# Altium PCB 4_Lay_PCB.PcbDoc (part 1 of 2)
Units mm, origin at the board's own origin, x right, y up, seen from the top; angles counter-clockwise.
Board outline 51.1 x 75.4 mm, 4 copper layers (Top, Signal Layer 1, Signal Layer 2, Bottom), stack 1.641 mm thick; 181 components, 104 nets, 542 pads, 589 vias.
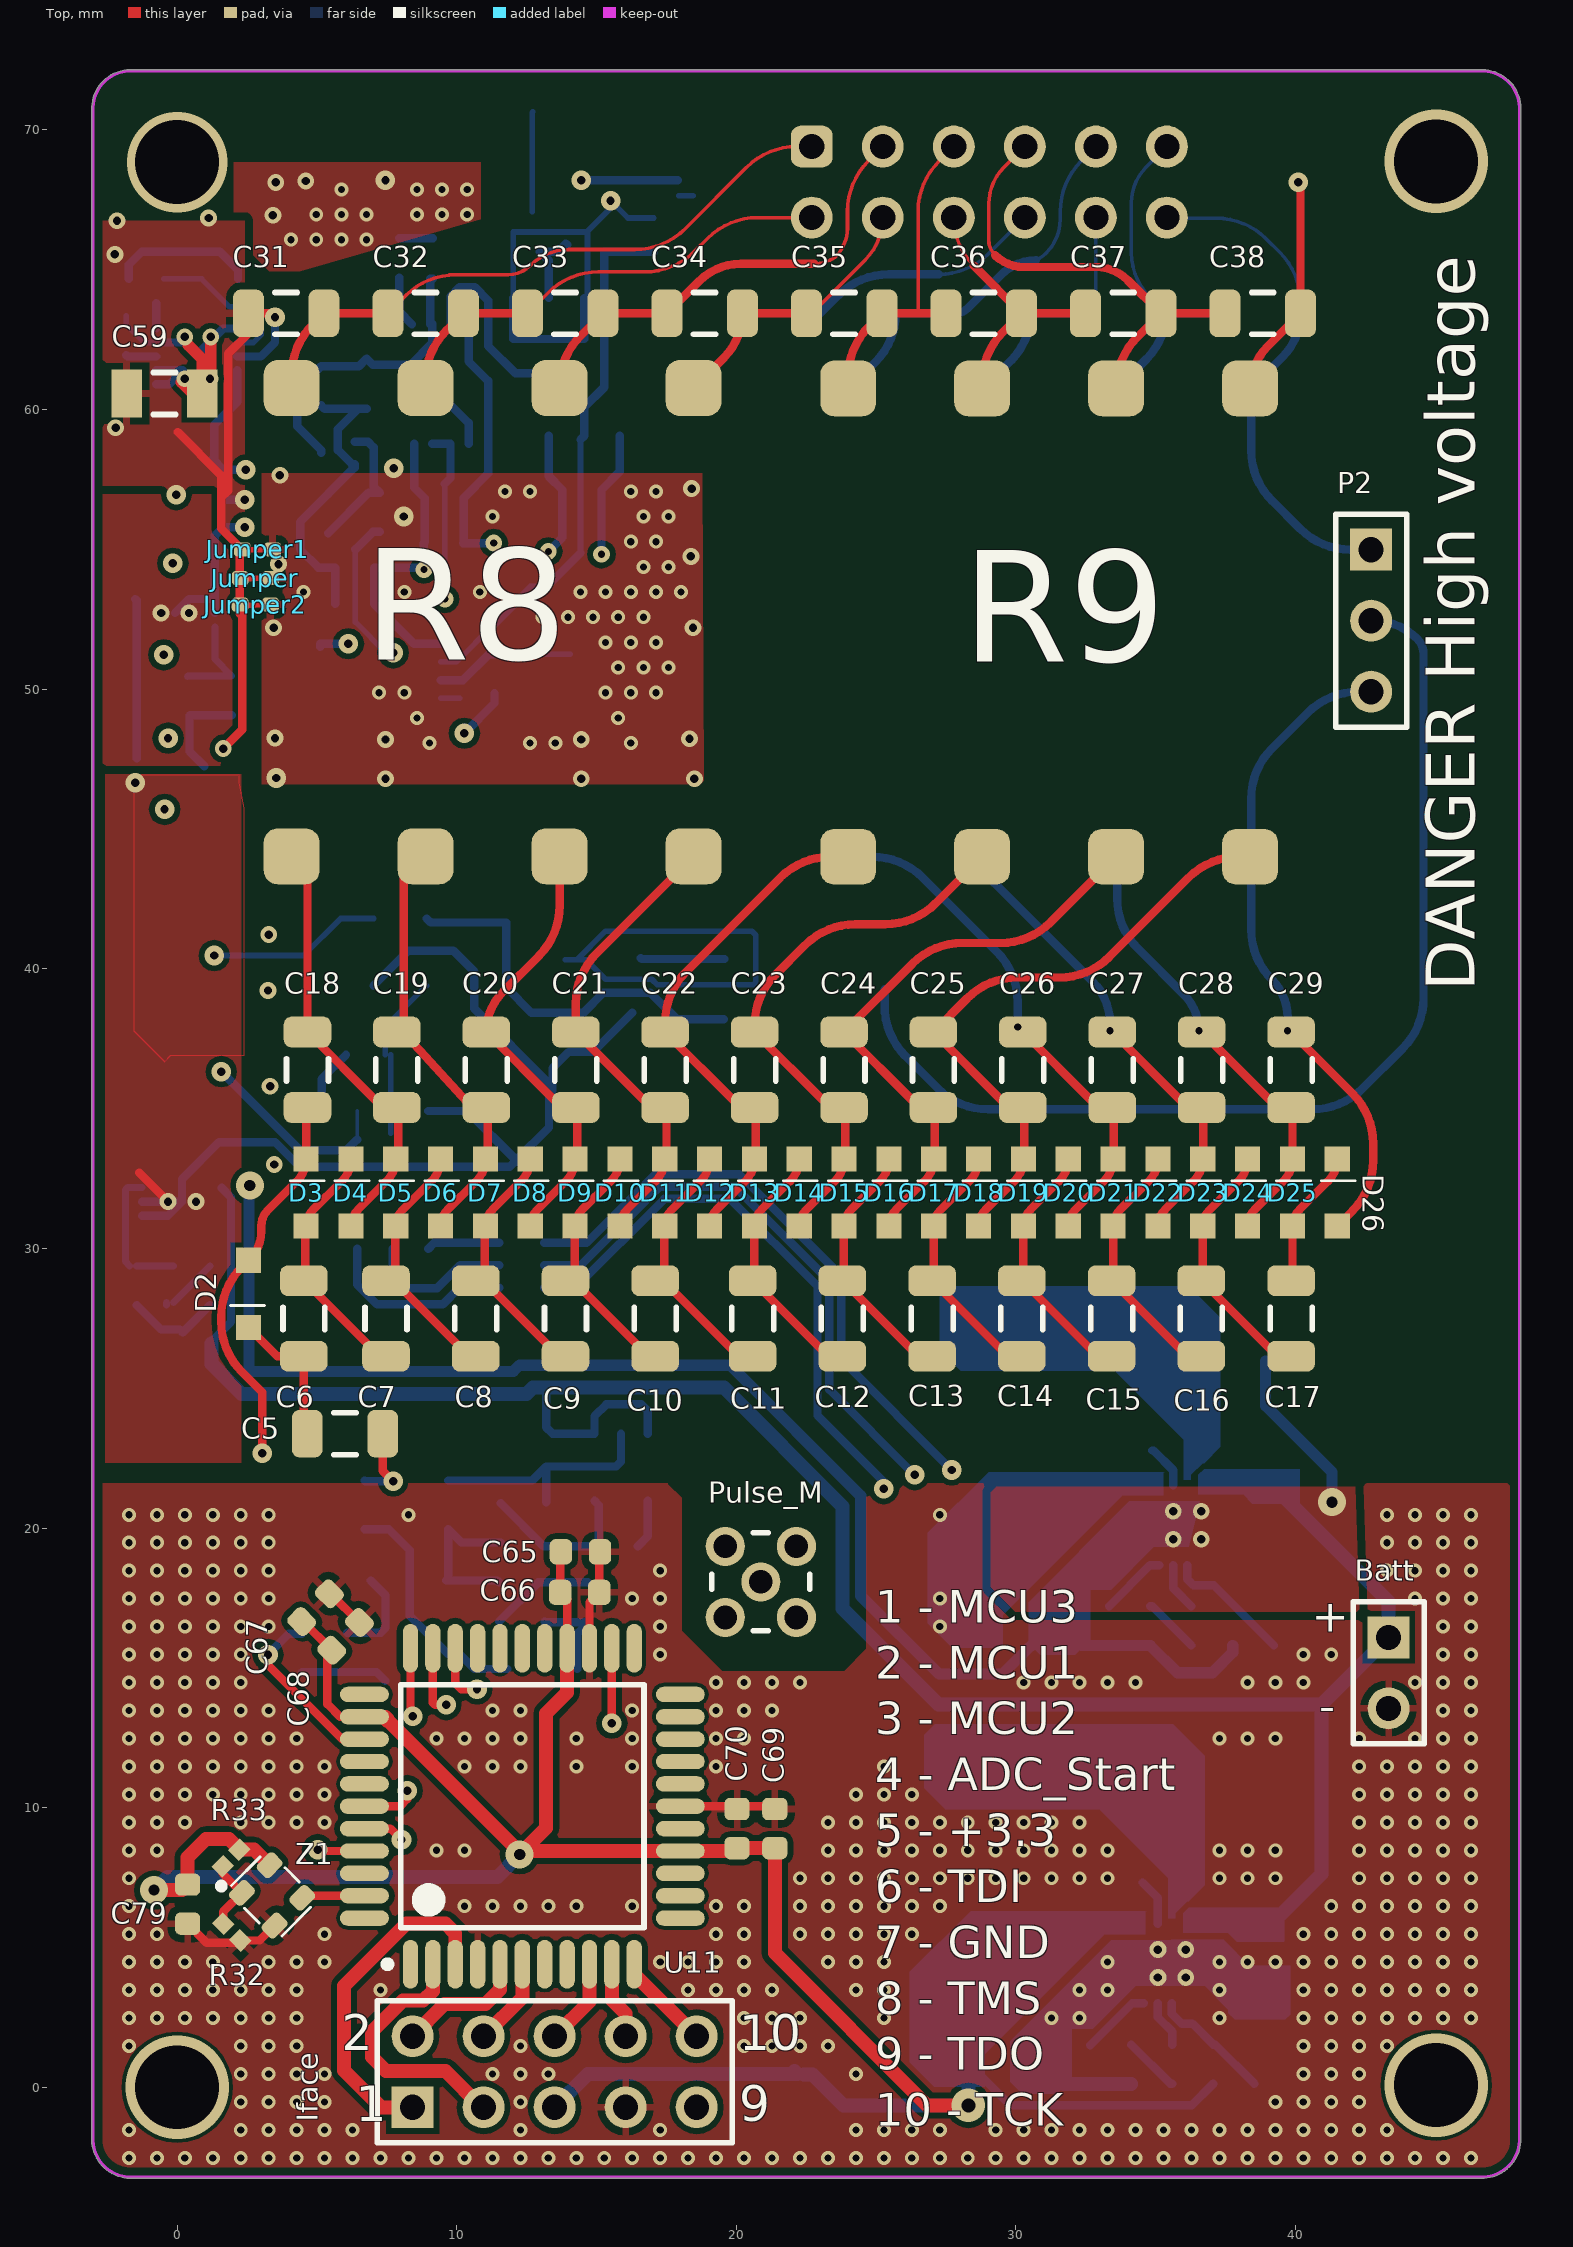
[diagram p0: Top view]
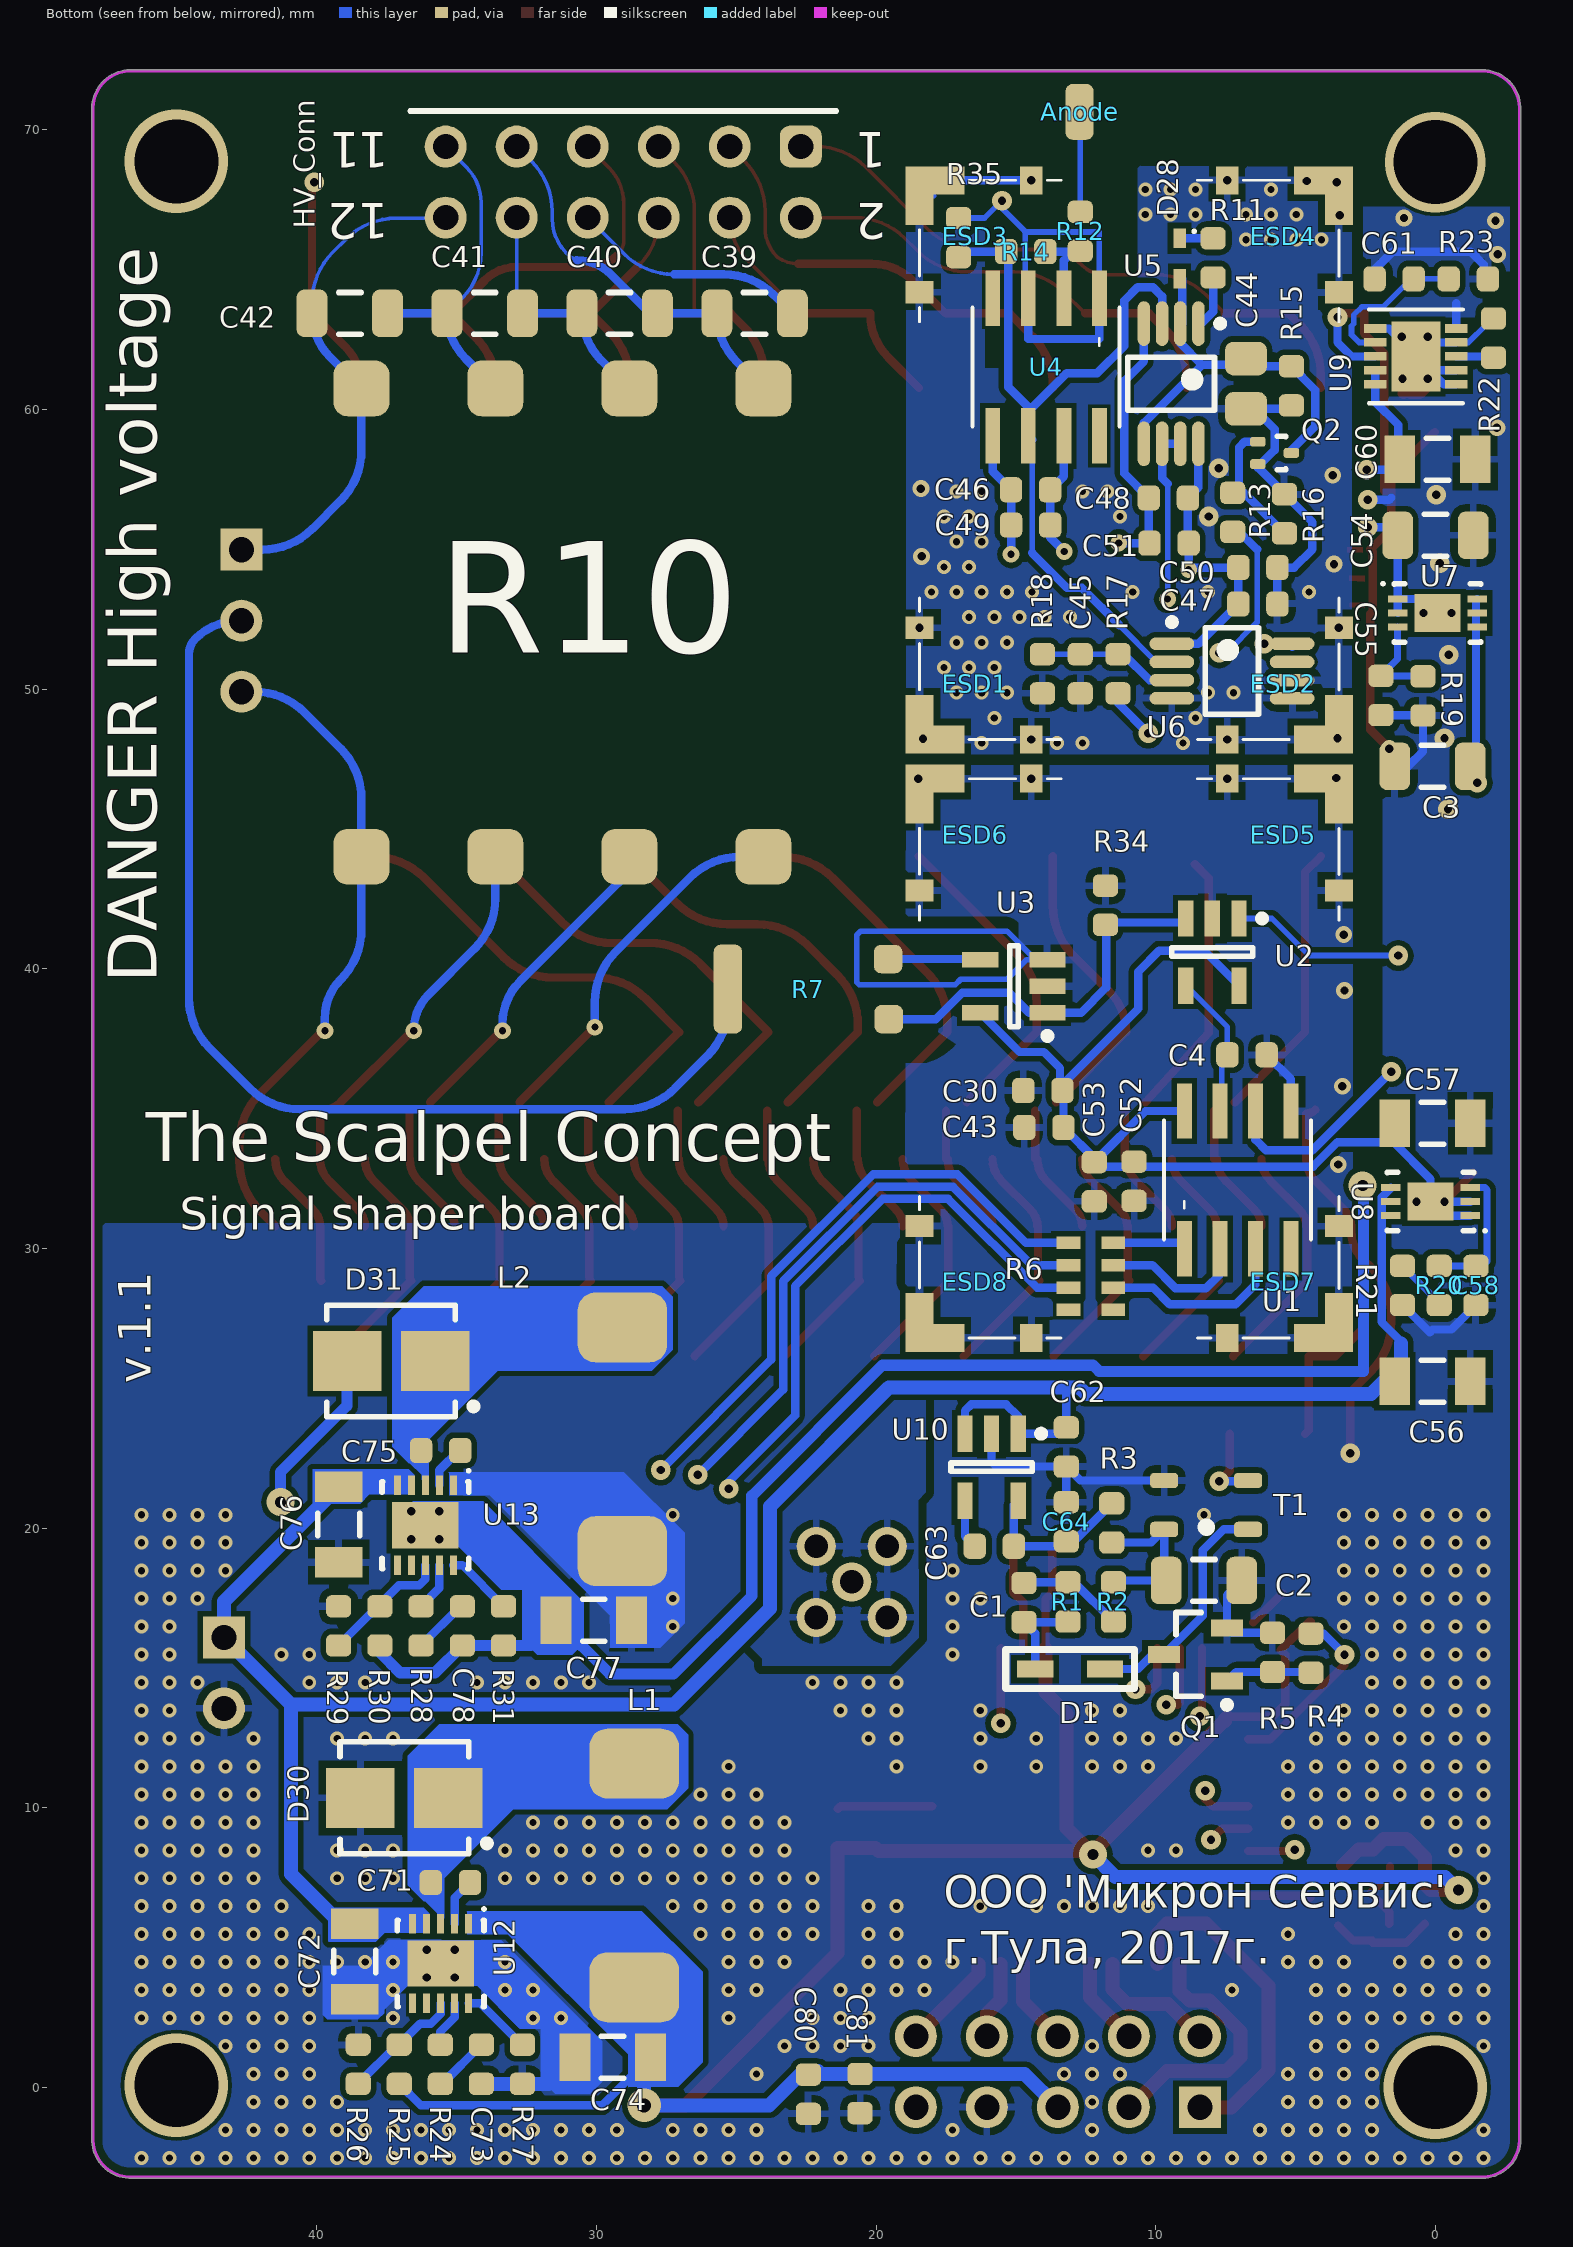
[diagram p1: Bottom view, seen from below]
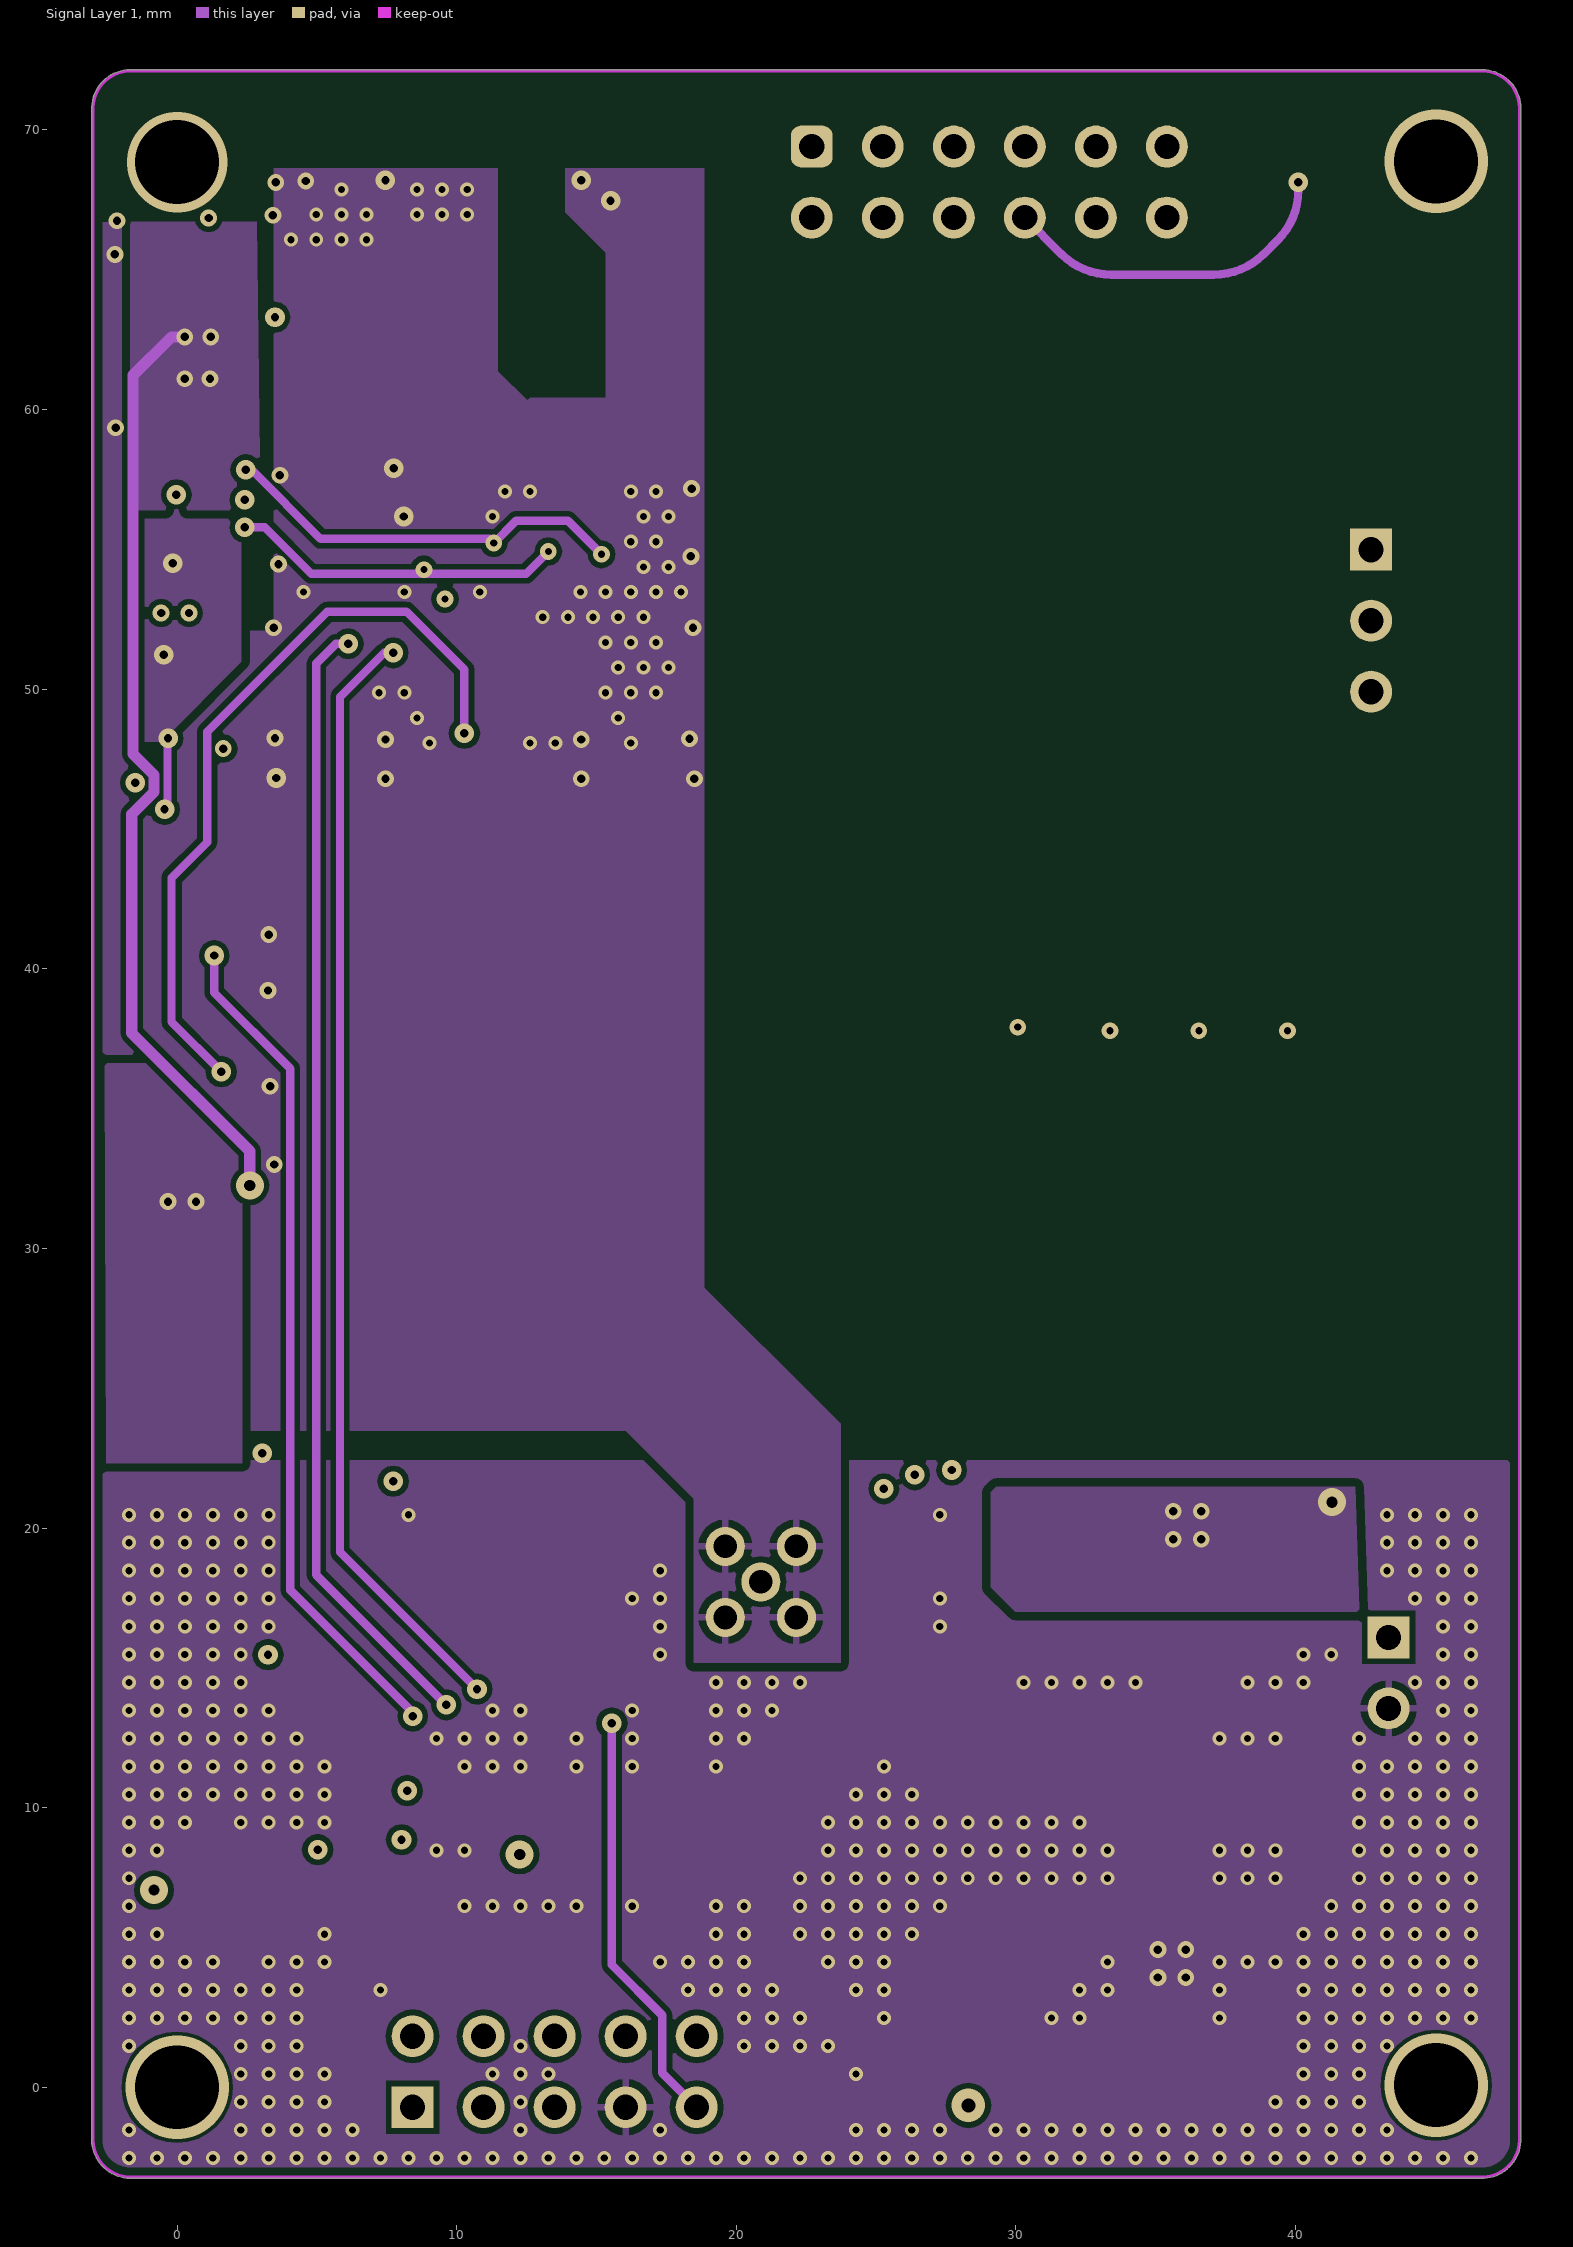
[diagram p2: Signal Layer 1]
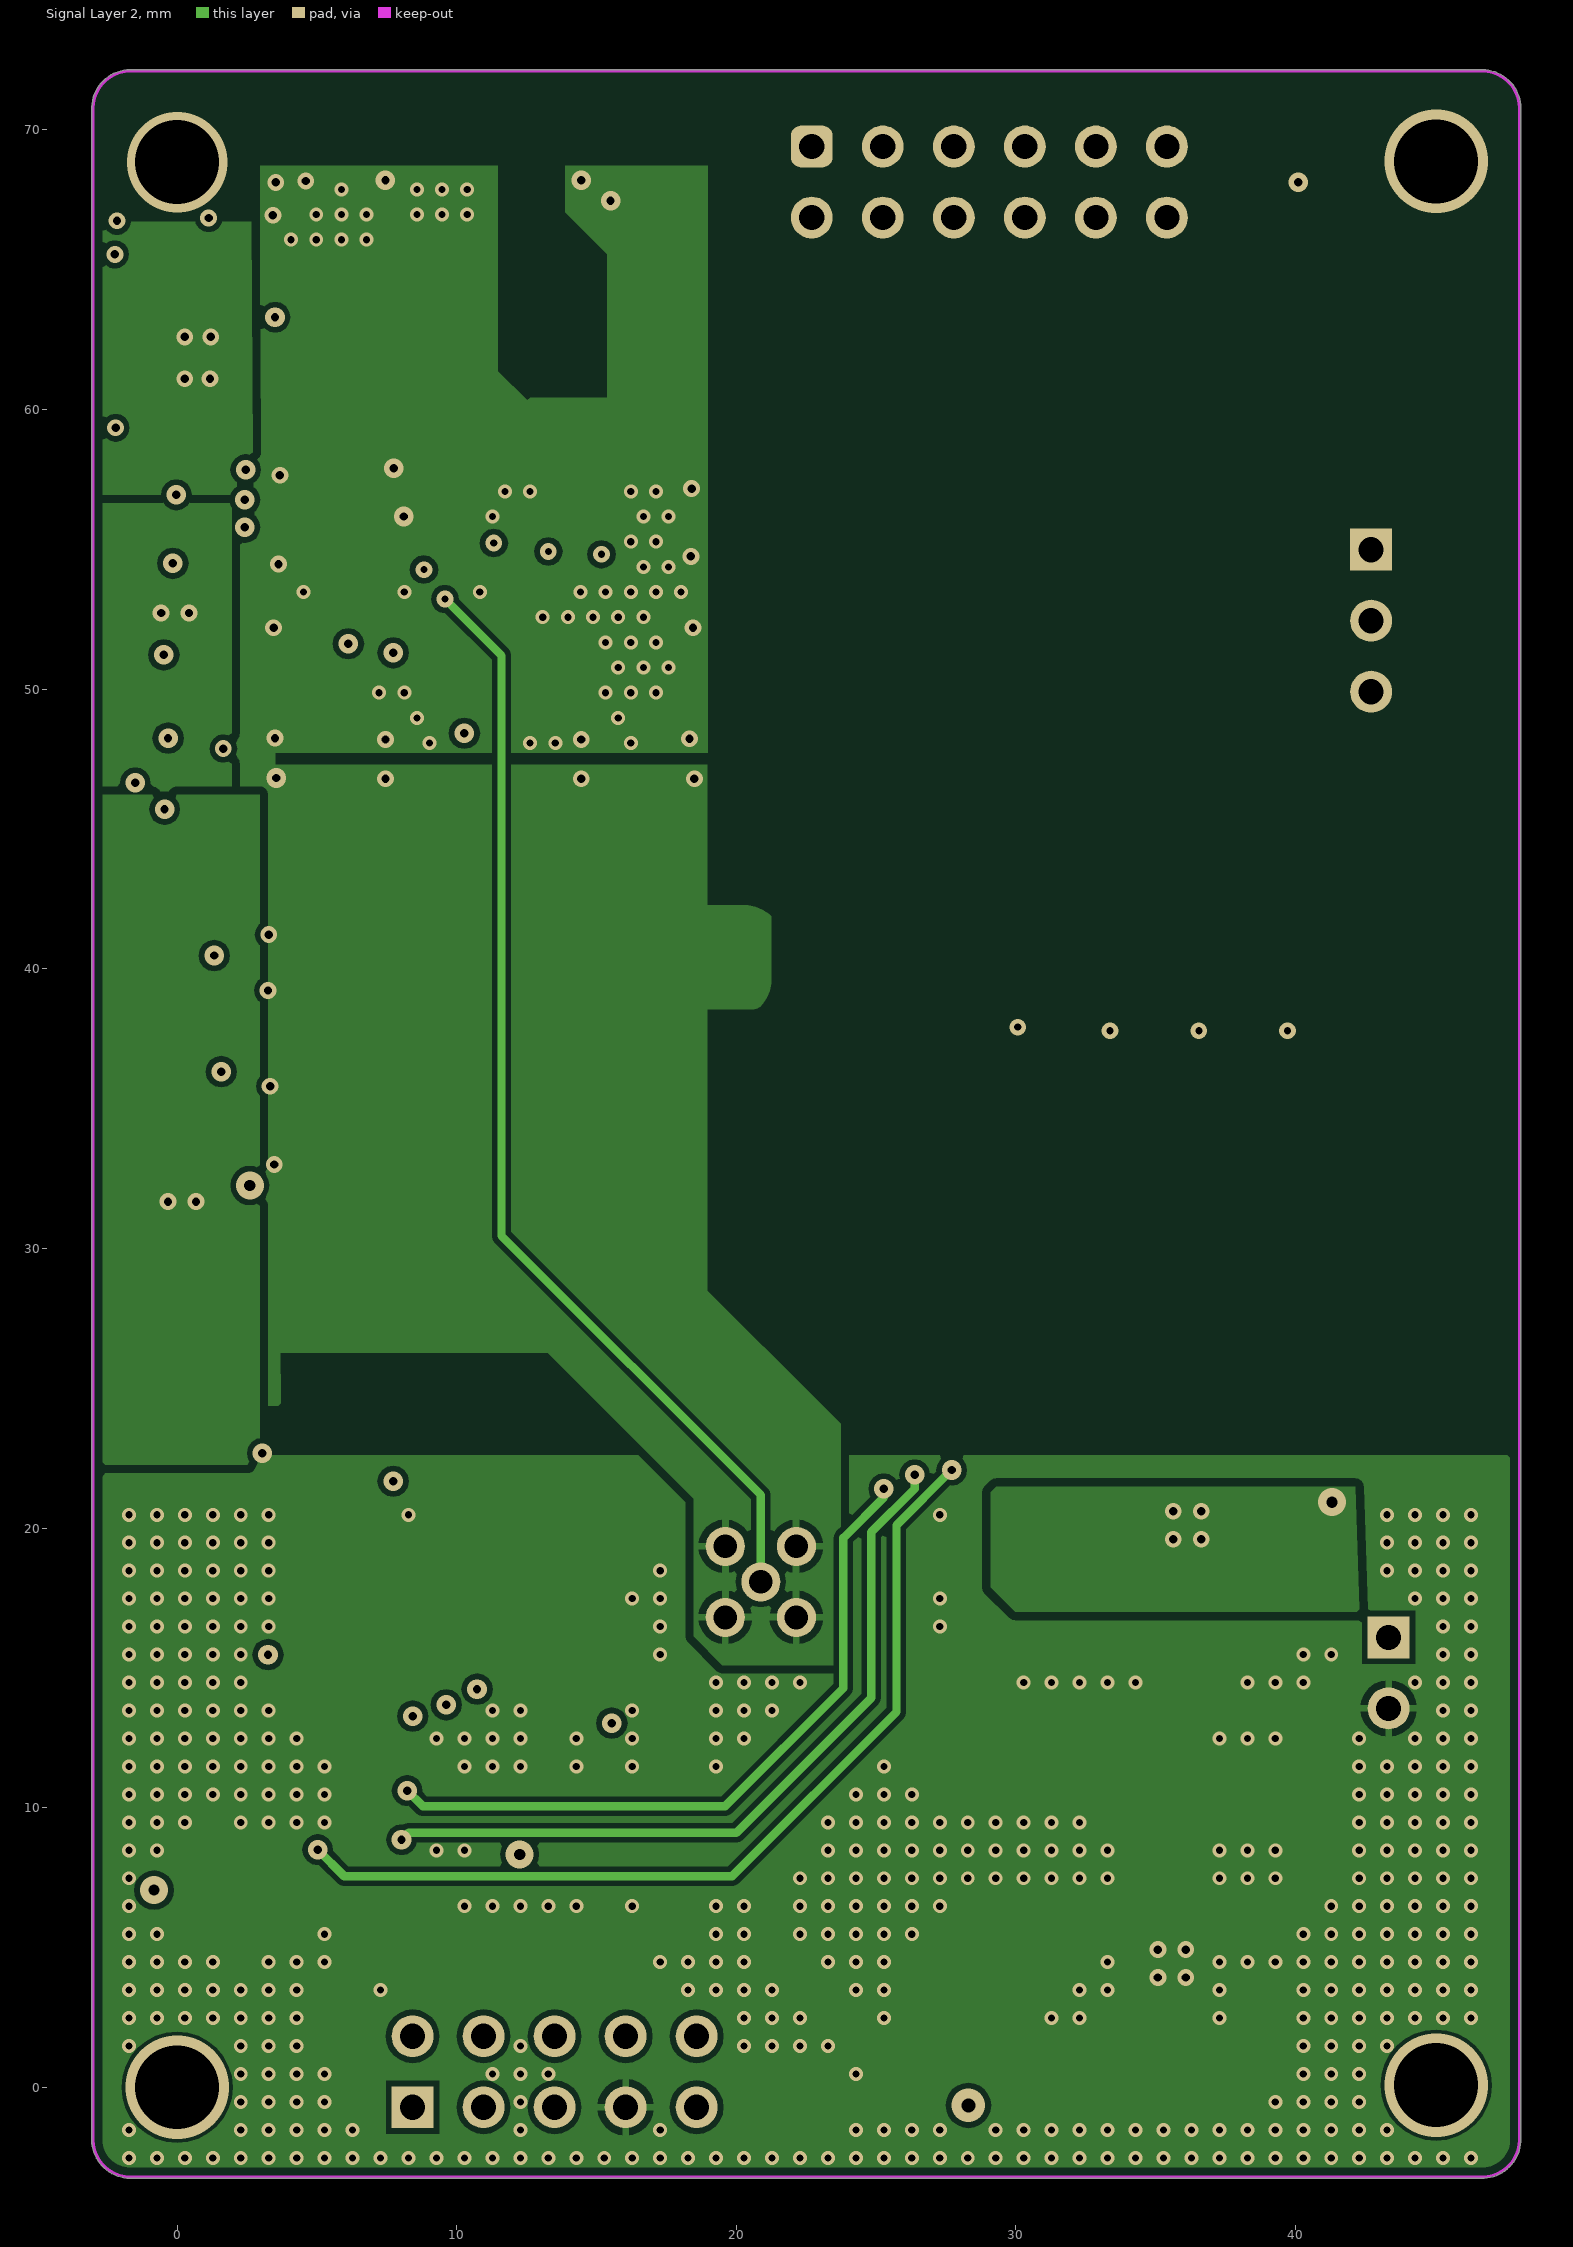
[diagram p3: Signal Layer 2]
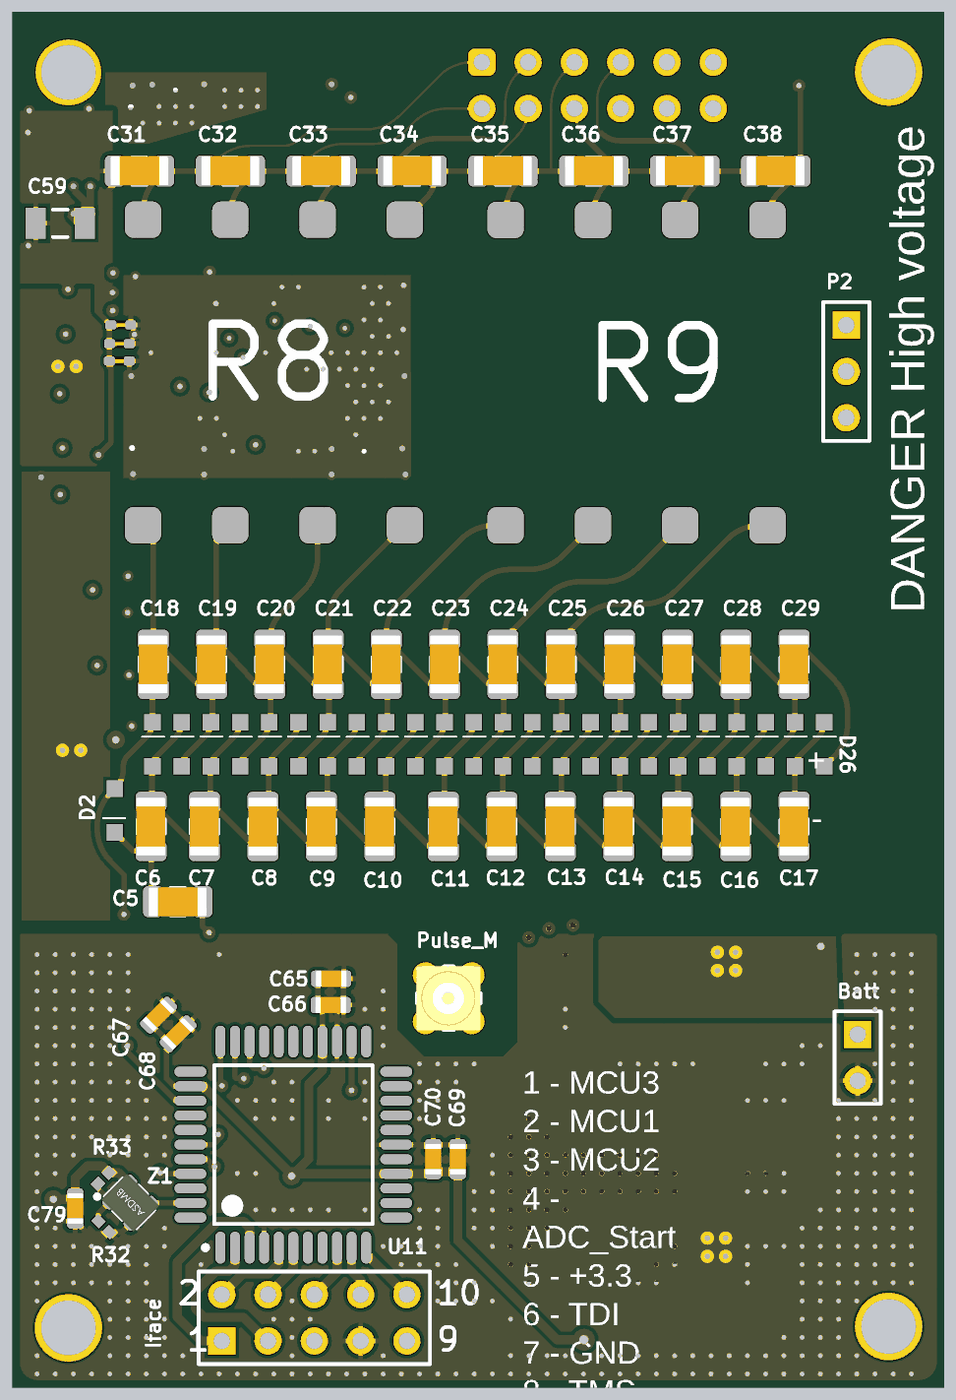
[diagram p5: 3D render of the assembled board from above, using the file's embedded part models]
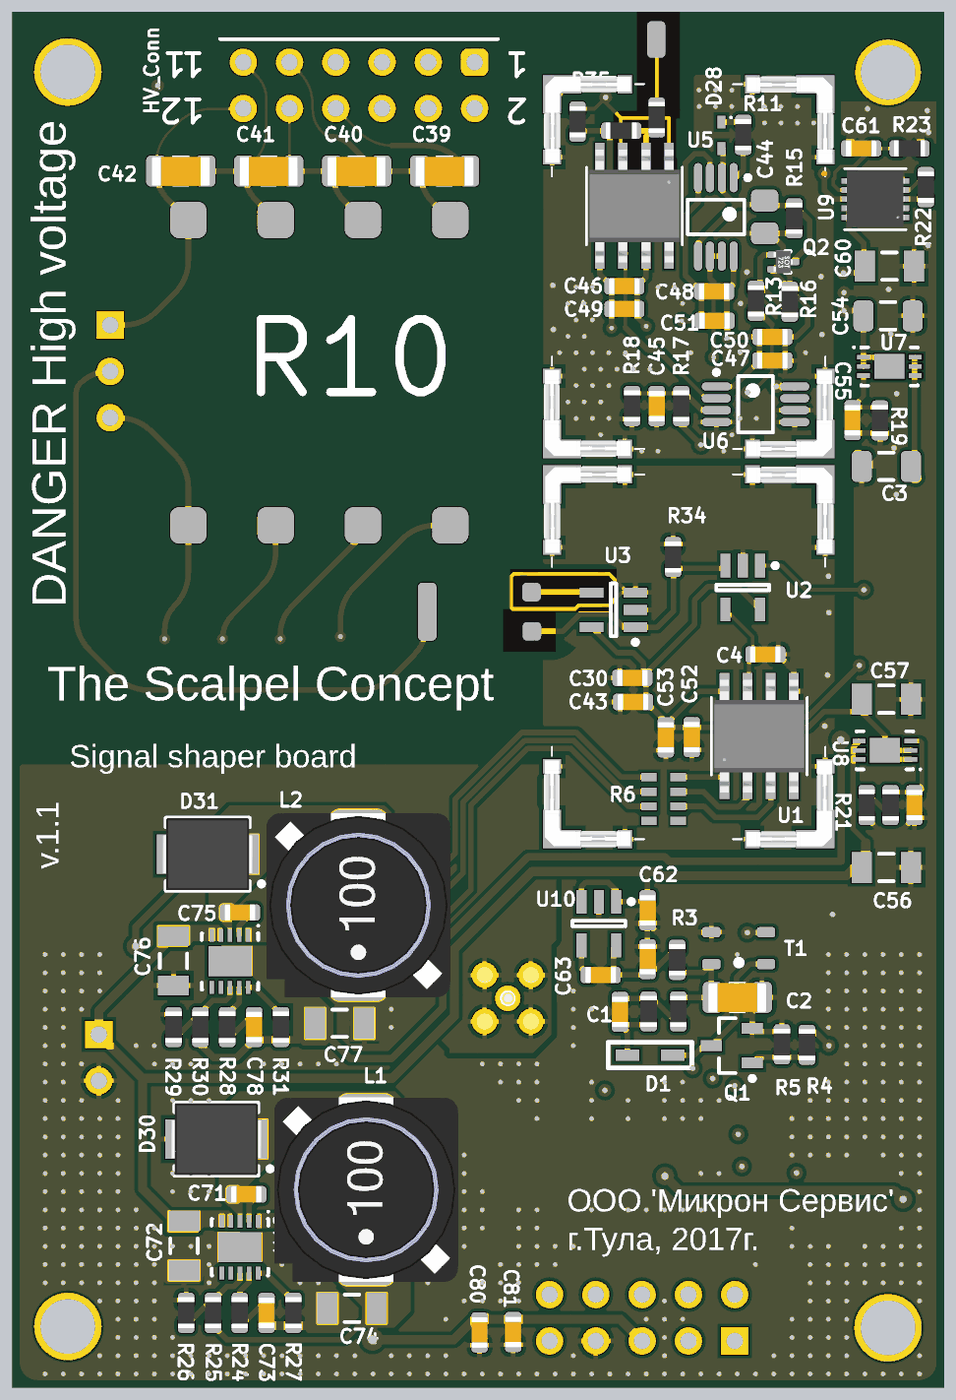
[diagram p6: 3D render of the assembled board from below, using the file's embedded part models]

## Layer stack, top to bottom
Top Solder: solder mask 0.0254, Solder Resist, Dk 3.5
Top: signal copper 0.0356
Pereg: prepreg 0.1702, FR408, Dk 3.66
Signal Layer 1: signal copper 0.0178
Core: core 1.1938, FR408, Dk 3.66
Signal Layer 2: signal copper 0.0178
Pereg: prepreg 0.1702, FR408, Dk 3.66
Bottom: signal copper 0.0356
Bottom Solder: solder mask 0.0254, Solder Resist, Dk 3.5

## Board outline
-3.051,-1.88 cw(c-3,-1.88) -3.05,-1.873 -3.05,70.805 cw(c-3,70.805) -3.05,70.811 cw(c-1.68,70.78) -1.68,72.151 cw(c-1.68,72.1) -1.672,72.15 46.68,72.15 cw(c46.68,70.779) 48.051,70.779 cw(c48,70.779) 48.05,70.772 48.05,-1.925 cw(c48,-1.925) 48.049,-1.936 cw(c46.68,-1.88) 46.732,-3.25 cw(c46.725,-3.2) 46.725,-3.25 46.716,-3.25 cw(c46.68,-1.88) 46.68,-3.251 cw(c46.68,-3.201) 46.672,-3.25 -1.68,-3.25 cw(c-1.68,-1.88)

## Design rules (kind name [scope] priority, off if disabled: settings)
BoardOutlineClearance [All] p1: gap=0.381
Clearance Clearance_polytopoly [InPolygon vs InPolygon] p1: gap=0.3
Clearance Clearance_polytotrace [InPolygon vs InAnyNet] p2: gap=0.2
Clearance Clearance_1 [All] p3: gap=0.127
HoleSize [All] p1: absolutevalues=TRUE maxlimit=6.604 minlimit=0.254 maxpercent=80.000 minpercent=20.000
MinimumAnnularRing [All] p1: minimumring=0.102
PolygonConnect PolygonConnect_via [IsVia] p1: connectstyle=Direct reliefconductorwidth=0.254 reliefentries=4 polygonreliefangle="90 Angle" airgapwidth=0.254
PolygonConnect [All] p2: connectstyle=Relief reliefconductorwidth=0.254 reliefentries=4 polygonreliefangle="90 Angle" airgapwidth=0.254
RoutingTopology [InNet('No Net')] p1: topology=Shortest
RoutingVias [All] p1: holewidth=0.254 width=0.457 viastyle="Through Hole" minholewidth=0.254 minwidth=0.457 maxholewidth=2.54 maxwidth=2.54
SolderMaskExpansion [All] p1: expansion=0.064
Width [All] p1: maxlimit=2.54 minlimit=0.127 preferedwidth=0.254
28 further rules are at their usual default settings.

## Classes and differential pairs
component class FEU31_Part2: Anode C1 C2 C3 C4 C5 C6 C7 C8 C9 C10 C11 C12 C13 C14 C15 C16 C17 C18 C19 C20 C21 C22 C23 C24 C25 C26 C27 C28 C29 C30 C31 C32 C33 C34 C35 C36 C37 C38 C39 C40 C41 C42 C43 C44 C45 C46 C47 C48 C49 C50 C51 C52 C53 C54 C55 C56 C57 C58 C59 C60 C61 C62 C63 C64 D1 D2 D3 D4 D5 D6 D7 D8 D9 D10 D11 D12 D13 D14 D15 D16 D17 D18 D19 D20 D21 D22 D23 D24 D25 D26 D28 ESD1 ESD2 ESD3 ESD4 ESD5 ESD6 ESD7 ESD8 ESD? HV_Conn Jumper Jumper1 Jumper2 P2 Pulse_M Q1 Q2 R1 R2 R3 R4 R5 R6 R7 R8 R9 R10 R11 R12 R13 R14 R15 R16 R17 R18 R19 R20 R21 R22 R23 R34 R35 T1 U1 U2 U3 U4 U5 U6 U7 U8 U9 U10 U?
component class CPLD: Batt C65 C66 C67 C68 C69 C70 C71 C72 C73 C74 C75 C76 C77 C78 C79 C80 C81 D30 D31 Iface L1 L2 R24 R25 R26 R27 R28 R29 R30 R31 R32 R33 U11 U12 U13 Z1

## Components (designator, comment, footprint, x,y, rotation, side; value= is the part's Value field where it differs from the comment)
Anode "Anode" PMTanode 12.725,70.65 r180 top
Batt "Header 2" HDR1X2 43.325,16.09 r270 top
C1 "100pF" 1608[0603]_CAP 14.715,17.333 r90 bottom
C2 "4.7uF" C1206#1 8.275,18.125 r180 bottom
C3 "47uF" C1206#1 0.1,47.244 r0 bottom
C4 "1nF" 1608[0603]_CAP 6.738,36.925 r0 bottom
C5 "100nF" C1206#1 6,23.375 r0 top
C6 "100nF" C1206#1 4.535,27.498 r270 top
C7 "100nF" C1206#1 7.47,27.498 r270 top
C8 "100nF" C1206#1 10.679,27.498 r270 top
C9 "100nF" C1206#1 13.889,27.498 r270 top
C10 "100nF" C1206#1 17.099,27.498 r270 top
C11 "100nF" C1206#1 20.583,27.498 r270 top
C12 "100nF" C1206#1 23.793,27.498 r270 top
C13 "100nF" C1206#1 27.002,27.498 r270 top
C14 "100nF" C1206#1 30.212,27.498 r270 top
C15 "100nF" C1206#1 33.422,27.498 r270 top
C16 "100nF" C1206#1 36.631,27.498 r270 top
C17 "100nF" C1206#1 39.841,27.498 r270 top
C18 "100nF" C1206#1 4.662,36.388 r270 top
C19 "100nF" C1206#1 7.86,36.388 r270 top
C20 "100nF" C1206#1 11.058,36.388 r270 top
C21 "100nF" C1206#1 14.256,36.388 r270 top
C22 "100nF" C1206#1 17.454,36.388 r270 top
C23 "100nF" C1206#1 20.652,36.388 r270 top
C24 "100nF" C1206#1 23.851,36.388 r270 top
C25 "100nF" C1206#1 27.049,36.388 r270 top
C26 "100nF" C1206#1 30.247,36.388 r270 top
C27 "100nF" C1206#1 33.445,36.388 r270 top
C28 "100nF" C1206#1 36.643,36.388 r270 top
C29 "100nF" C1206#1 39.841,36.388 r270 top
C30 "1uF" 1608[0603]_CAP 14.037,35.648 r0 bottom
C31 "100nF" C1206#1 3.9,63.439 r180 top
C32 "100nF" C1206#1 8.889,63.439 r180 top
C33 "100nF" C1206#1 13.879,63.439 r180 top
C34 "100nF" C1206#1 18.868,63.439 r180 top
C35 "100nF" C1206#1 23.857,63.439 r180 top
C36 "100nF" C1206#1 28.846,63.439 r180 top
C37 "100nF" C1206#1 33.836,63.439 r180 top
C38 "100nF" C1206#1 38.825,63.439 r180 top
C39 "100nF" C1206#1 24.347,63.439 r180 bottom
C40 "100nF" C1206#1 29.173,63.439 r180 bottom
C41 "100nF" C1206#1 33.999,63.439 r180 bottom
C42 "100nF" C1206#1 38.825,63.439 r180 bottom
C43 "100nF" 1608[0603]_CAP 14,34.325 r0 bottom
C44 "1nF" 0805_CAP 6.775,60.925 r270 bottom
C45 "1nF" 1608[0603]_CAP 12.703,50.55 r270 bottom
C46 "1uF" 1608[0603]_CAP 14.476,57.13 r0 bottom
C47 "1uF" 1608[0603]_CAP 6.35,53.05 r180 bottom
C48 "1uF" 1608[0603]_CAP 9.551,56.839 r0 bottom
C49 "100nF" 1608[0603]_CAP 14.475,55.875 r0 bottom
C50 "100nF" 1608[0603]_CAP 6.35,54.35 r180 bottom
C51 "100nF" 1608[0603]_CAP 9.525,55.225 r0 bottom
C52 "1uF" 1608[0603]_CAP 10.775,32.4 r270 bottom
C53 "100nF" 1608[0603]_CAP 12.2,32.383 r270 bottom
C54 "4.7uF" C1206#1 0,55.5 r180 bottom
C55 "100nF" 1608[0603]_CAP 1.95,49.775 r270 bottom
C56 "47uF" C1206#2 0.1,25.25 r180 bottom
C57 "4.7uF" C1206#2 0.1,34.475 r180 bottom
C58 "100nF" 1608[0603]_CAP -1.447,28.674 r270 bottom
C59 "4.7uF" C1206#2 -0.45,60.575 r180 top
C60 "4.7uF" C1206#2 -0.075,58.225 r180 bottom
C61 "100nF" 1608[0603]_CAP 1.475,64.675 r0 bottom
C62 "1uF" 1608[0603]_CAP 13.2,22.9 r270 bottom
C63 "10nF" 1608[0603]_CAP 15.775,19.35 r180 bottom
C64 "1uF" 1608[0603]_CAP 13.2,20.225 r90 bottom
C65 "1uF" 1608[0603]_CAP 14.425,19.152 r0 top
C66 "100nF" 1608[0603]_CAP 14.4,17.702 r0 top
C67 "1uF" 1608[0603]_CAP 4.95,17.152 r45 top
C68 "100nF" 1608[0603]_CAP 6.025,16.127 r45 top
C69 "1uF" 1608[0603]_CAP 21.375,9.252 r90 top
C70 "100nF" 1608[0603]_CAP 20.025,9.252 r90 top
C71 "470nF" 1608[0603]_CAP 35.225,7.325 r0 bottom
C72 "4.7uF" C1206#2 38.65,4.5 r270 bottom
C73 "470pF" 1608[0603]_CAP 34.119,0.825 r270 bottom
C74 "47uF" C1206#2 29.425,1.075 r0 bottom
C75 "470nF" 1608[0603]_CAP 35.575,22.775 r0 bottom
C76 "4.7uF" C1206#2 39.225,20.125 r270 bottom
C77 "47uF" C1206#2 30.1,16.7 r0 bottom
C78 "330pF" 1608[0603]_CAP 34.8,16.5 r270 bottom
C79 "100nF" 1608[0603]_CAP 0.375,6.55 r270 top
C80 "1uF" 1608[0603]_CAP 22.425,-0.25 r270 bottom
C81 "100nF" 1608[0603]_CAP 20.575,-0.225 r270 bottom
D1 "PMEG4010BEA" PMEG4010BEA 13.065,14.958 r180 bottom
D2 "" DA2JF8100L 2.55,29.575 r270 top
D3 "" DA2JF8100L 4.614,30.8 r90 top
D4 "" DA2JF8100L 6.218,30.8 r90 top
D5 "" DA2JF8100L 7.821,30.8 r90 top
D6 "" DA2JF8100L 9.424,30.8 r90 top
D7 "" DA2JF8100L 11.028,30.8 r90 top
D8 "" DA2JF8100L 12.631,30.8 r90 top
D9 "" DA2JF8100L 14.235,30.8 r90 top
D10 "" DA2JF8100L 15.838,30.8 r90 top
D11 "" DA2JF8100L 17.441,30.8 r90 top
D12 "" DA2JF8100L 19.045,30.8 r90 top
D13 "" DA2JF8100L 20.648,30.8 r90 top
D14 "" DA2JF8100L 22.251,30.8 r90 top
D15 "" DA2JF8100L 23.855,30.8 r90 top
D16 "" DA2JF8100L 25.458,30.8 r90 top
D17 "" DA2JF8100L 27.062,30.8 r90 top
D18 "" DA2JF8100L 28.665,30.8 r90 top
D19 "" DA2JF8100L 30.268,30.8 r90 top
D20 "" DA2JF8100L 31.872,30.8 r90 top
D21 "" DA2JF8100L 33.475,30.8 r90 top
D22 "" DA2JF8100L 35.078,30.8 r90 top
D23 "" DA2JF8100L 36.682,30.8 r90 top
D24 "" DA2JF8100L 38.285,30.8 r90 top
D25 "" DA2JF8100L 39.889,30.8 r90 top
D26 "" DA2JF8100L 41.492,30.8 r90 top
D28 "DB2S316" SSMini2-F5-B 9.15,65.4 r270 bottom
D30 "VS-10BQ030-M3/5BT" SMB 36.875,10.35 r0 bottom
D31 "VS-10BQ030-M3/5BT" SMB 37.35,25.975 r0 bottom
ESD1 "Harwin Clips" "HARWIN - S0981-46R - CLIP" 18.95,47.7 r180 bottom
ESD2 "Harwin Clips" "HARWIN - S0981-46R - CLIP" 2.95,47.7 r90 bottom
ESD3 "Harwin Clips" "HARWIN - S0981-46R - CLIP" 18.95,68.7 r270 bottom
ESD4 "Harwin Clips" "HARWIN - S0981-46R - CLIP" 2.95,68.7 r0 bottom
ESD5 "Harwin Clips" "HARWIN - S0981-46R - CLIP" 2.95,47.3 r0 bottom locked
ESD6 "Harwin Clips" "HARWIN - S0981-46R - CLIP" 18.95,47.3 r270 bottom locked
ESD7 "Harwin Clips" "HARWIN - S0981-46R - CLIP" 2.95,26.3 r90 bottom locked
ESD8 "Harwin Clips" "HARWIN - S0981-46R - CLIP" 18.95,26.3 r180 bottom locked
HV_Conn "HV_Conn" HDR2X6H 22.696,69.408 r0 bottom locked
Iface "Header 5X2" HDR2X5 8.42,-0.715 r0 top
Jumper "Value" "0402 jumper" 2.8,53.975 r90 top net-tie
Jumper1 "Value" "0402 jumper" 2.875,55 r90 top net-tie
Jumper2 "Value" "0402 jumper" 2.795,53.025 r90 top net-tie
L1 "10uH" SLF10145 28.65,7.475 r180 bottom
L2 "10uH" SLF10145 29.075,23.075 r180 bottom
P2 "SelHv" HDR1X3 42.7,54.99 r270 top
Pulse_M "MMCX PCB" MMCX2.54-V5 20.875,18.075 r0 top
Q1 "IRLML6344" SOT-23_N 8.579,15.478 r0 bottom
Q2 "RUM002N05T2L" RUM002N05 5.75,58.45 r180 bottom
R1 "820R" 1608[0603]_RES 13.14,17.358 r90 bottom
R2 "100R" 1608[0603]_RES 11.515,17.358 r90 bottom
R3 "12R" 1608[0603]_RES 11.575,20.183 r90 bottom
R4 "100R" 1608[0603]_RES 4.45,15.525 r270 bottom
R5 "47k" 1608[0603]_RES 5.829,15.553 r270 bottom
R6 "47R" CAT16-470J4LF 11.525,30.6 r270 bottom
R7 "CDHVAF1G00G5000GET" CDHV2512 25.175,39.275 r0 bottom
R8 "MC4-1003JE" MC4 19.496,61.797 r270 top locked
R9 "MC4-1003JE" MC4 39.4,61.783 r270 top
R10 "MC4-1003JE" MC4 23.01,61.783 r270 bottom
R11 "49.9R" 1608[0603]_RES 7.95,65.425 r90 bottom
R12 "49.9R" 1608[0603]_RES 12.7,66.375 r270 bottom
R13 "49.9R" 1608[0603]_RES 7.25,56.325 r270 bottom
R14 "221K" 1608[0603]_RES 14.65,65.65 r180 bottom
R15 "249K" 1608[0603]_RES 5.15,60.85 r270 bottom
R16 "47K" 1608[0603]_RES 5.4,56.275 r90 bottom
R17 "100K" 1608[0603]_RES 11.35,50.55 r90 bottom
R18 "49.9R" 1608[0603]_RES 14.056,50.55 r270 bottom
R19 "249K" 1608[0603]_RES 0.443,49.759 r270 bottom
R20 "249K" 1608[0603]_RES -0.135,28.674 r90 bottom
R21 "249K" 1608[0603]_RES 1.178,28.674 r90 bottom
R22 "10K" 1608[0603]_RES -2.075,62.558 r270 bottom
R23 "49.9K" 1608[0603]_RES -1.175,64.675 r0 bottom
R24 "14K" 1608[0603]_RES 35.588,0.825 r90 bottom
R25 "309K" 1608[0603]_RES 37.056,0.825 r270 bottom
R26 "100K" 1608[0603]_RES 38.525,0.825 r270 bottom
R27 "68.1K" 1608[0603]_RES 32.65,0.825 r90 bottom
R28 "18.2K" 1608[0603]_RES 36.275,16.5 r90 bottom
R29 "309K" 1608[0603]_RES 39.225,16.5 r90 bottom
R30 "100K" 1608[0603]_RES 37.75,16.5 r90 bottom
R31 "68.1K" 1608[0603]_RES 33.325,16.5 r90 bottom
R32 "None" "0402 Yageo" 1.95,5.55 r135 top
R33 "None" "0402 Yageo" 1.925,8.2 r225 top
R34 "47K" 1608[0603]_RES 11.8,42.275 r90 bottom
R35 "47K" 1608[0603]_RES 17.05,66.15 r90 bottom
T1 "ATB322524" ATB322515-0110 9.7,21.7 r180 bottom
U1 "LTC1655CS8" SO-8_S 7.075,32.45 r90 bottom
U2 "LTC6240CS5" LT-S5-5-TSOT-23_N 7.975,40.6 r270 bottom
U3 "LTC6240CS5" LT-S5-5-TSOT-23_N 15.075,39.375 r0 bottom
U4 "LTC6268HS8" SO-8_S 13.925,61.525 r270 bottom
U5 "LTC6253IMS8" LT-MS8-8_N 9.45,60.925 r270 bottom
U6 "LT1711CMS8" LT-MS8_N 7.275,50.65 r180 bottom
U7 "LT3085EDCB" LT-DCB-6_V -0.075,52.725 r180 bottom
U8 "LT3085EDCB" LT-DCB-6_V 0.175,31.675 r0 bottom
U9 "LT3090EDD" DFN-10_DD 0.702,61.9 r0 bottom
U10 "LT1761ES5-3" LT-S5-5-TSOT-23_N 15.875,22.175 r270 bottom
U11 "XC9572XL-10VQG44C" VQG44_N 12.346,10.05 r90 top
U12 "LT3480EDD" LT-DD-10_V 35.575,4.425 r270 bottom
U13 "LT3480EDD" LT-DD-10_V 36.125,20.1 r270 bottom
Z1 "MEMS 50MHz" asdmb 2.318,6.952 r315 top

## Footprints (in the part's own frame and the unit in brackets; to place one, negate y for a bottom-side part, rotate by r counter-clockwise, add the part's x,y. Pads: shape width x height; smd on the part's side, far side on the other; paste and mask are expansions set on the pad)
"0402 jumper" [mm]
  rrect50% 0.5x0.6 smd: 1(0,0.545) 2(0,-0.545)
  Top region: -0.125,0.275 0.075,0.275 0.075,-0.275 -0.1,-0.275
"0402 Yageo" [mm]
  rect 0.6x0.55 smd: 1(-0.425,0) 2(0.425,0)
  body extent -0.53,-0.27 0.53,0.28, height 0.4
0805_CAP [mm]
  rrect50% 1.2x1.5 smd: 1(-0.9,0) 2(0.9,0)
  body extent -1.11,-0.72 1.1,0.72, height 0.94
1608[0603]_CAP [mm] "Chip Capacitor, Body 1.6x0.8mm, IPC High Density"
  rrect50% 0.8x0.9 smd: 1(-0.7,0) 2(0.7,0)
  body extent -0.85,-0.45 0.85,0.45, height 0.8
1608[0603]_RES [mm] "Chip Capacitor, Body 1.6x0.8mm, IPC High Density"
  rrect50% 0.8x0.9 smd: 1(-0.7,0) 2(0.7,0)
  body extent -0.85,-0.45 0.85,0.45, height 0.45
asdmb [mm]
  rrect50% 0.65x0.85 smd: 1(0,0) 2(1.65,0) 3(1.65,1.4) 4(0,1.4)
  silkscreen extent -0.77,-0.43 2.1,1.73, body extent -0.42,-0.3 2.08,1.7, height 0.81
ATB322515-0110 [mm]
  rrect50% 1x0.55 smd: 1(0,-1.75) 2(0,0) 3(3,0) 4(3,-1.75)
  silkscreen extent 1.5,-1.68 1.52,-1.66, body extent -0.1,-2.15 3.1,0.35, height 1.55
C1206#1 [mm] "Chip Capacitor, Body 3.2x1.6mm, IPC High Density"
  rrect50% 1.1x1.7 smd: 1(-1.35,0) 2(1.35,0)
  silkscreen extent -0.4,-0.75 0.4,0.75, body extent -1.6,-0.81 1.6,0.79, height 1.6
C1206#2 [mm] "Chip Capacitor, Body 3.2x1.6mm, IPC High Density"
  rect 1.1x1.7 smd: 1(-1.35,0) 2(1.35,0)
  silkscreen extent -0.4,-0.75 0.4,0.75, body extent -1.7,-0.9 1.7,0.9, height 1.3
CAT16-470J4LF [mm]
  rect 0.45x0.85 smd: 1(0.4,0) 2(1.2,0) 3(2,0) 4(2.8,0) 5(0.4,-1.6) 6(1.2,-1.6) 7(2,-1.6) 8(2.8,-1.6)
  body extent 0,-1.6 3.2,0, height 0.5
CDHV2512 [mm]
  rrect50% 1.02x3.18 smd: 1(0.125,0)
  rrect50% 1.02x1.02 smd: 2(-5.625,1.075) 3(-5.6,-1.075)
  body extent -5.85,-1.6 0.5,1.6, height 0.64
DA2JF8100L [mm]
  rect 0.9x0.9 smd: 1(0,0) 2(2.4,0)
  silkscreen extent 1.62,-0.64 1.62,0.57, body extent 0.36,-0.65 2.06,0.6, height 0.7
DFN-10_DD [mil]
  rect 32x12 smd: 1(-57,39.37) 2(-57,19.68) 3(-57,0) 4(-57,-19.69) 5(-57,-39.37) 6(57,-39.37) 7(57,-19.69) 8(57,0) 9(57,19.68) 10(57,39.37)
  rect 69x98 smd paste-48.5: 11(0,0)
  silkscreen extent -66,-66 66,66, body extent -63,-61 63,61, height 32
"HARWIN - S0981-46R - CLIP" [mm]
  rect 1x0.8 smd: 1(0.5,4.5)
  rect 1x2.1 smd: 1(0.5,1.05)
  rect 2.1x1 smd: 1(1.05,0.5)
  rect 0.8x1 smd: 1(4.5,0.5)
  silkscreen extent 0.5,0.5 5.56,5.56, body extent 0.05,0.07 4.81,4.83, height 1.35
HDR1X2 [mm] "Connector; Header; 2 Position"
  rect 1.5x1.5 hole 0.9: 1(0,0)
  round 1.5 hole 0.9: 2(2.54,0)
  silkscreen extent -1.27,-1.27 3.81,1.27
HDR1X3 [mm] "Connector; Header; 3 Position"
  rect 1.5x1.5 hole 0.9: 1(0,0)
  round 1.5 hole 0.9: 2(2.54,0) 3(5.08,0)
  silkscreen extent -1.27,-1.27 6.35,1.27
HDR2X5 [mm] "Connector; Header; 5x2 Position"
  rect 1.5x1.5 hole 0.9: 1(0,0)
  round 1.5 hole 0.9: 2(0,2.54) 3(2.54,0) 4(2.54,2.54) 5(5.08,0) 6(5.08,2.54) 7(7.62,0) 8(7.62,2.54) 9(10.16,0) 10(10.16,2.54)
  silkscreen extent -1.27,-1.27 11.43,3.81
HDR2X6H [mm] "Connector; Header; 6x2 Position; Right Angle"
  rrect50% 1.5x1.5 hole 0.9: 1(0,0)
  round 1.5 hole 0.9: 2(0,2.54) 3(2.54,0) 4(2.54,2.54) 5(5.08,0) 6(5.08,2.54) 7(7.62,0) 8(7.62,2.54) 9(10.16,0) 10(10.16,2.54) 11(12.7,0) 12(12.7,2.54)
  silkscreen extent -1.27,-1.27 13.97,-1.27
LT-DCB-6_V [mm] "SON, 6-Leads, Body 3x2mm, Pitch 0.5mm, Thermal Pad 1.65x1.35mm"
  rect 0.7x0.25 smd mask+0.102: 1(-1.425,0.5) 2(-1.425,0) 3(-1.425,-0.5) 4(1.425,-0.5) 5(1.425,0) 6(1.425,0.5)
  rect 1.65x1.35 smd mask+0.102: 7(0,0)
  silkscreen extent -2,-1.05 1.55,1.1, body extent -1.5,-1 1.5,1, height 0.8
LT-DD-10_V [mm] "SON, 10-Leads, Body 3x3mm, Pitch 0.5mm, Thermal Pad 2.38x1.65mm"
  rect 0.7x0.25 smd: 1(-1.425,1) 2(-1.425,0.5) 3(-1.425,0) 4(-1.425,-0.5) 5(-1.425,-1) 6(1.425,-1) 7(1.425,-0.5) 8(1.425,0) 9(1.425,0.5) 10(1.425,1)
  rect 1.65x2.38 smd: 11(0,0)
  silkscreen extent -2,-1.55 1.55,1.6, body extent -1.5,-1.5 1.5,1.5, height 0.8
LT-MS8-8_N [mm] "SOP, 8-Leads, Body 3x3mm, Pitch 0.65mm, IPC Medium Density"
  oval 1.6x0.45 smd: 1(-2.15,0.975) 2(-2.15,0.325) 3(-2.15,-0.325) 4(-2.15,-0.975) 5(2.15,-0.975) 6(2.15,-0.325) 7(2.15,0.325) 8(2.15,0.975)
  silkscreen extent -2.27,-1.55 0.95,1.87, body extent -1.55,-1.55 1.55,1.55, height 1.1
LT-MS8_N [mm] "SOP, 8-Leads, Body 3x3mm, Pitch 0.65mm, IPC Medium Density"
  oval 1.6x0.45 smd: 1(-2.15,0.975) 2(-2.15,0.325) 3(-2.15,-0.325) 4(-2.15,-0.975) 5(2.15,-0.975) 6(2.15,-0.325) 7(2.15,0.325) 8(2.15,0.975)
  silkscreen extent -2.28,-1.55 0.95,1.87, body extent -1.55,-1.55 1.55,1.55, height 1.1
LT-S5-5-TSOT-23_N [mm] "SOT23, 5-Leads, Body 2.90x1.63mm, Pitch 0.95mm, IPC Medium Density"
  rect 1.3x0.55 smd: 1(-1.2,0.95) 2(-1.2,0) 3(-1.2,-0.95) 4(1.2,-0.95) 5(1.2,0.95)
  silkscreen extent -1.32,-1.45 0.15,1.9, body extent -0.87,-1.45 0.87,1.45, height 1
MC4 [mm]
  rrect50% 2x2 smd: 1(1.025,-1.025) 2(1.025,-5.817) 3(1.025,-10.608) 4(1.025,-15.4) 5(17.775,-1.025) 6(17.775,-5.817) 7(17.775,-10.608) 8(17.775,-15.4)
  body extent -0.32,-17.95 19.15,1.52, height 2
MMCX2.54-V5 [mm] "Connector; RF Coaxial, MMCX, Thru-Hole; 5 Position; Vertical"
  round 1.4 hole 0.85: 1(0,0) 2(-1.27,-1.27) 3(1.27,-1.27) 4(1.27,1.27) 5(-1.27,1.27)
  silkscreen extent -1.75,-1.75 1.75,1.75, body extent -1.78,-1.75 1.73,1.75, height 4.42
PMEG4010BEA [mm]
  rect 1.3x0.6 smd: A(-1.25,0) K(1.25,0)
  silkscreen extent -2.3,-0.7 2.3,0.7, body extent -1.1,-0.5 1.1,0.5, height 1.1
PMTanode [mm] "Generic Antenna; 1 Lead"
  rrect50% 1x2 smd far side: 1(0,0)
RUM002N05 [mm] "SOTFL, 3-Leads, Body 1,20x1,20mm, Pitch 0,40mm, IPC Medium Density"
  rrect50% 0.55x0.35 smd: 1(-0.6,0.4) 2(-0.6,-0.4) 3(0.6,0)
  silkscreen extent 0.1,-0.6 0.4,0.6, body extent -0.53,-0.62 0.52,0.63, height 0.45
SLF10145 [mm]
  rrect50% 3.2x2.5 smd: 1(0,4.1) 2(0,-3.9)
  body extent -5.05,-4.96 5.05,5.16, height 4.5
SMB [mm] "Molded Diode, 2-Leads, Body 4,31x3,62mm, IPC Medium Density"
  rect 2.45x2.15 smd: 1(1.575,0) 2(-1.575,0)
  silkscreen extent -3.07,-2 2.3,2, body extent -2.5,-1.97 2.51,1.97, height 2.44
SO-8_S [mil]
  rect 78x21 smd: 1(-97,75) 2(-97,25) 3(-97,-25) 4(-97,-75) 5(97,-75) 6(97,-25) 7(97,25) 8(97,75)
  silkscreen extent -84,-104 84,104, body extent -122,-99 122,99, height 69
SOT-23_N [mm] "SOT23, 3-Leads, Body 2.9x1.3mm, Pitch 0.95mm, Lead Span 2.3mm, IPC Medium Density"
  rect 1.15x0.6 smd: 1(-1.125,0.95) 2(-1.125,-0.95) 3(1.125,0)
  silkscreen extent -1.25,-1.5 0.7,1.92, body extent -0.7,-1.5 0.7,1.5, height 1.11
SSMini2-F5-B [mm]
  rect 0.7x0.45 smd: 1(-0.725,0) 2(0.725,0)
  silkscreen extent -1.02,0.48 -0.93,0.57, body extent -0.6,-0.4 0.6,0.4, height 0.6
VQG44_N [mm] "Thin QFP, 44-Leads, Body 10x10mm, Pitch 0.8mm, IPC Medium Density"
  oval 1.75x0.55 smd: 1(-5.65,4) 2(-5.65,3.2) 3(-5.65,2.4) 4(-5.65,1.6) 5(-5.65,0.8) 6(-5.65,0) 7(-5.65,-0.8) 8(-5.65,-1.6) 9(-5.65,-2.4) 10(-5.65,-3.2) 11(-5.65,-4) 23(5.65,-4) 24(5.65,-3.2) 25(5.65,-2.4) 26(5.65,-1.6) 27(5.65,-0.8) 28(5.65,0) 29(5.65,0.8) 30(5.65,1.6) 31(5.65,2.4) 32(5.65,3.2) 33(5.65,4)
  oval 0.55x1.75 smd: 12(-4,-5.65) 13(-3.2,-5.65) 14(-2.4,-5.65) 15(-1.6,-5.65) 16(-0.8,-5.65) 17(0,-5.65) 18(0.8,-5.65) 19(1.6,-5.65) 20(2.4,-5.65) 21(3.2,-5.65) 22(4,-5.65) 34(4,5.65) 35(3.2,5.65) 36(2.4,5.65) 37(1.6,5.65) 38(0.8,5.65) 39(0,5.65) 40(-0.8,5.65) 41(-1.6,5.65) 42(-2.4,5.65) 43(-3.2,5.65) 44(-4,5.65)
  silkscreen extent -5.77,-4.35 4.35,4.95, body extent -5,-5 5,5, height 1.2

## Part data
Anode: library part Socket, "Socket"
Batt: "Header, 2-Pin"
C1 C2 C3 C4 C5 C6 C7 C8 C9 C10 C11 C12 C13 C14 C15 C16 C17 C18 C19 C20 C21 C22 C23 C24 C25 C26 C27 C28 C29 C30 C31 C32 C33 C34 C35 C36 C37 C38 C39 C40 C41 C42 C43 C44 C45 C46 C47 C48 C49 C50 C51 C52 C53 C54 C55 C56 C57 C58 C59 C60 C61 C62 C63 C64 C65 C66 C67 C68 C69 C70 C71 C72 C73 C74 C75 C76 C77 C78 C79 C80 C81: library part "Cap Semi", "Capacitor (Semiconductor SIM Model)"
D2 D3 D4 D5 D6 D7 D8 D9 D10 D11 D12 D13 D14 D15 D16 D17 D18 D19 D20 D21 D22 D23 D24 D25 D26 D28 D30 D31: library part Diode, "Default Diode"
HV_Conn: library part "Header 6X2H", "Header, 6-Pin, Dual row, Right Angle"
Iface: "Header, 5-Pin, Dual row"
Jumper Jumper1 Jumper2 R1 R2 R3 R4 R5 R11 R12 R13 R14 R15 R16 R17 R18 R19 R20 R21 R22 R23 R24 R25 R26 R27 R28 R29 R30 R31 R32 R33 R34 R35: library part "Resistor 0805"
L1 L2: library part Inductor, "Inductor"
P2: library part "Header 3", "Header, 3-Pin"
Pulse_M: library part COAX-M, "RF Coaxial PCB Connector, MMCX; Thru-Hole, Vertical Mount Plug,  50 Ohm Impedance"
Q1 Q2: library part IRLML2402, "HEXFET Power MOSFET"
R6 R8 R9 R10: library part CAT16-470J4LF
T1: library part ATB322515-0110
U1: "Imported"
U2 U3: library part LTC6240CS5#PBF, "Single Channel, Low Noise, CMOS Operational Amplifier, RRO, 18 MHz Typical GBW, 10 V/us Typical SR, 2.8 to 6 V, 5-Pin SOT23 (S5-5), Commercial, Pb-Free"
U4: library part LTC6268HS8PBF, "Imported"
U5: library part LTC6253IMS8#PBF, "Dual Channel, Power Efficient Operational Amplifier, RRIO, 720 MHz Typical GBW, 280 V/us Typical SR, 2.5 to 5.25 V, 8-Pin SOP (MS8-8), Industrial, Pb-Free"
U6: "4.5 ns, 3 V / 5 V / + / - 5 V, Rail-to-Rail Comparator, 1 Channel, 2.4 to 12 V or + / - 2.4 to + / - 6 V, 0 to +70 degC, 8-pin Plastic MSOP (MS8)"
U7 U8: library part LT3085EDCB#PBF, "Adjustable 500 mA Single Resistor Low Dropout Regulator, 0.3 mA Isupply, 6-pin SON (DCB-6), -40 to 125 degC, Pb-Free"
U9: library part LT3090EDDPBF, "Imported"
U10: "100 mA, Low Noise, LDO Micropower Regulator, 1.8 to 20 V Vin, 3 V Vout, 5-pin SOT23 (S5-5), -40 to 125 degC"
U11: "FastFLASH XC900XL, 3.3V High-Performance 72 Macrocell CPLD, 34 User I/Os, 44-Pin VQFP, Speed Grade 10, Commercial Grade, Pb-Free"
U12 U13: library part LT3480EDD#PBF, "2 A, 2.4 MHz Step-Down Switching Regulator with 70 uA Quiescent Current, 10-pin SON (DD-10), -40 to 85 degC, Pb-Free"
Z1: library part ASEMB

## Via types
v1: diameter 0.5, hole 0.256, Top to Bottom, tented both sides, 495 vias
v2: diameter 0.7, hole 0.3, Top to Bottom, tented both sides, 35 vias
v3: diameter 0.6, hole 0.3, Top to Bottom, tented both sides, 29 vias
v4: diameter 0.6, hole 0.3, Top to Bottom, 12 vias
v5: diameter 0.6, hole 0.254, Top to Bottom, tented both sides, 9 vias
v6: diameter 1, hole 0.4, Top to Bottom, tented both sides, 4 vias
v7: diameter 3.7, hole 3, Top to Bottom, 3 vias
v8: diameter 1.2, hole 0.5, Top to Bottom, tented both sides, 1 vias
v9: diameter 3.6, hole 3, Top to Bottom, 1 vias

## Nets (pads, with @x,y where several pads share a name; then routed paths per layer and width w, separated by ;. In a path a pad name is that pad's centre, name@x,y a point inside that pad or via, vN(x,y) a via of type N, cw(c..) or ccw(c..) an arc to the next point about the centre after c; other vN are vias at no path point)
1MV: C45.1 R17.2 R18.1 U6.3 | length 5
  Bottom w0.2: R17.2@11.375,51.225 11.4,51.25 C45.1@12.703,51.25 R18.1@14.056,51.25
  Bottom w0.3: U6.3@9.425,50.325 10.225,50.325 11.15,51.25 R17.2@11.35,51.25
3.3V: C65.1 C66.1 C67.1 C68.1 C69.1 C70.1 C74.1 C79.1 C80.1 C81.1 Iface.5 L1.2 R25.2 R33.1 U11.15 U11.26 U11.35 U12.1 Z1.4 | length 93
  Top w0.3: C67.1@4.455,16.657 4.505,16.657 C68.1@5.53,15.632 5.375,15.477 5.375,13.7 5.825,13.25 U11.35@6.696,13.25 U11.35@7.45,13.25 ; C65.1@13.725,19.152 13.7,19.127 C66.1@13.7,17.702 13.946,17.456 U11.26@13.946,15.7
  Top w0.5: v6(-0.825,7.05) 0.175,7.05 C79.1@0.375,7.25 0.375,8.225 1.025,8.875 1.851,8.875 R33.1@2.226,8.501 2.749,8.501 Z1.4@3.308,7.942 ; U11.35@7.45,13.25 7.523,13.177 7.523,13.102 7.566,13.102 12.25,8.418 12.25,8.45 v6@12.375,8.45 ; v6(12.25,8.325) v6@12.375,8.45 ; U11.26@13.946,15.7 13.946,14.121 13.2,13.375 13.2,9.275 v6@12.375,8.45 ; v8(28.3,-0.65) 26.825,-0.65 21.375,4.8 C69.1@21.375,8.552 C70.1@20.025,8.552 19.923,8.45 U11.15@17.996,8.45 v6@12.375,8.45
  Bottom w0.3: C74.1@28.3,0.85 29.8,-0.65 36.281,-0.65 R25.2@37.056,0.125
  Bottom w0.5: v6(-0.825,7.05) -0.35,7.525 11.45,7.525 v6(12.25,8.325) ; Iface.5@13.5,-0.715 14.69,0.475 C81.1@20.575,0.475 C80.1@22.175,0.475 ; C80.1@21.975,0.475 C80.1@22.075,0.575 ; C80.1@22.425,0.45 22.725,0.45 23.825,-0.65 v8(28.3,-0.65) 28.3,0.85 C74.1@28.075,1.075
50MHZ: U11.43 Z1.3 | length 2.3
  Top w0.3: Z1.3@4.475,6.775 4.55,6.85 U11.43@6.696,6.85
+2.5ANALOG: C46.1 C47.1 C48.1 C49.1 C50.1 C51.1 C54.1 U4.7 U5.8 U6.1 U7.1 U7.2 U7.7 | length 32.7
  Signal Layer 1 w0.3: v2(2.425,55.785) 3.14,55.785 4.8,54.125 12.475,54.125 v5(13.275,54.925)
  Bottom w0.3: U7.7@-0.075,52.725 0.425,53.225 U7.1@1.35,53.225 ; U7.2@1.35,52.725 U7.1@1.35,53.225 ; v2(2.425,55.785) 1.635,55.785 C54.1@1.35,55.5 U7.1@1.35,53.225 ; U5.8@8.475,58.775 8.475,57.215 C48.1@8.851,56.839 8.851,55.251 C51.1@8.825,55.225 v5@8.825,54.35 ; v5(8.825,54.275) v5@8.825,54.35 ; U6.1@9.425,51.625 8.475,51.625 C47.1@7.05,53.05 C50.1@7.05,54.35 v5@8.825,54.35 ; v5(13.275,54.925) 13.775,55.425 C49.1@13.775,55.875 C49.1@13.775,55.875 C46.1@13.776,57.13 13.29,57.616 U4.7@13.29,59.061
  other v4: -0.575,52.725 0.425,52.725
+5ANALOG: C3.1 C30.1 C43.1 C52.1 C53.1 C57.1 U1.8 U2.5 U3.5 U7.4 U7.5 U7.6 U8.1 U8.2 U8.7 | length 45.3
  Top w0.3: -1.35,32.7 v4(-0.325,31.675)
  Bottom w0.3: U7.6@-1.5,53.225 -1.45,53.175 C3.1@-1.45,47.52 ; U8.1@-1.25,31.175 -0.325,31.175 U8.7@0.175,31.675 ; U8.2@-1.25,31.675 v4(-0.325,31.675) U8.7@0.175,31.675 ; U2.5@7.025,39.4 8.275,40.65 9.875,40.65 10.625,39.9 10.625,38.58 13.337,35.868 C30.1@13.337,35.648 ; U1.8@8.98,34.914 10.369,34.914 C53.1@12.129,33.154 ; C53.1@12.2,33.083 C53.1@12.129,33.154 ; U3.5@16.275,38.425 14.875,37.025 14,37.025 13.425,36.45 13.425,35.648 13.3,35.523 C43.1@13.3,34.325 C53.1@12.129,33.154 ; U8.7@0.175,31.675 0.175,32.475 1.5,33.8 3.5,33.8 4.375,32.925 11.9,32.925 C53.1@12.129,33.154
  other v2: -1.5,46.65
  other v4: 0.675,31.675
-2.5ANALOG: C46.2 C48.2 C49.2 C51.2 C60.1 U4.5 U5.4 U9.9 U9.10 | length 33.6
  Signal Layer 1 w0.3: v2(2.45,57.853) 2.656,57.853 5.134,55.375 11.175,55.375 v5(11.325,55.225) 12.125,56.025 13.975,56.025 v5(15.175,54.825)
  Bottom w0.3: U9.9@2.15,61.4 U9.10@2.15,60.9 2.15,60.275 1.325,59.45 1.325,58.275 C60.1@1.275,58.225 1.647,57.853 v2(2.45,57.853) ; U5.4@10.425,63.075 10.425,61.725 11.125,61.025 11.125,57.713 C48.2@10.251,56.839 10.251,55.251 C51.2@10.225,55.225 v5(11.325,55.225) ; v5(15.175,54.825) C49.2@15.175,55.875 15.176,55.876 C46.2@15.176,57.13 15.83,57.784 U4.5@15.83,59.061
ADC_START: Iface.4 U11.6 | length 3.1
  Top w0.5: Iface.4@10.96,1.825 12.346,3.211 U11.6@12.346,4.4
AGND: C4.1 C30.2 C43.2 C44.2 C45.2 C47.2 C50.2 C52.2 C53.2 ESD1.1 ESD2.1 ESD3.1 ESD4.1 ESD5.1 ESD6.1 ESD7.1 ESD8.1 Jumper1.2 Jumper2.2 Jumper.2 Pulse_M.2 Pulse_M.3 Pulse_M.4 Pulse_M.5 Q2.2 R15.2 R16.2 R18.2 R34.2 R35.2 U1.5 U2.2 U3.2 U3.3 U4.1 U4.3 U6.4 U6.5 U6.6 | length 51.5
  Signal Layer 2 w0.2: v3@3.65,57.675 v3(3.675,57.65)
  Bottom w0.2: U6.4@9.425,49.675 U6.4@10.108,49.675 ; U4.1@12.023,63.756 12.023,66.344 ; 12.023,66.352 14.675,66.352 ; U3.3@13.875,40.325 U3.3@14.3,40.325 ; U4.3@14.675,63.756 14.675,66.344 cw(c14.75,66.344) 14.697,66.397 15.5,67.2 v2(15.5,67.475) 16.125,66.85 R35.2@17.05,66.85 ; 17.946,67.65 ESD3.1@18.45,67.65 ; U3.3@14.3,40.325 15.325,41.35 20.55,41.35 20.7,41.2 20.7,39.525 20.6,39.425 17.175,39.425 16.975,39.625 15.325,39.625 14.625,40.325 U3.3@14.3,40.325
  Bottom w0.3: R15.2@5.15,60.15 5.275,60.025 C44.2@6.475,60.025 ; U1.5@5.17,34.914 5.17,36.057 C4.1@6.038,36.925 ; C47.2@5.65,53.05 C50.2@5.65,54.35 5.05,54.35 4.4,55 4.4,55.975 R16.2@5.4,56.975 ; 6.225,57.825 5.4,57 R16.2@5.4,56.975 ; C44.2@6.775,60.025 C44.2@6.475,60.025 ; U4.1@12.02,63.989 12.02,62.525 14.56,62.525 U4.3@14.56,63.989 ; v2(14.45,68.2) ESD3.1@17.9,68.2 ; R16.2@5.4,56.975 6.35,57.925 Q2.2@6.35,58.05 6.25,58.05 5.75,58.55 5.75,59.3 C44.2@6.475,60.025
  other v1: 9.025,48.075 12.625,48.075 13.525,48.075 16.225,48.075 8.575,48.975 15.775,48.975 7.225,49.875 8.125,49.875 15.325,49.875 16.225,49.875 17.125,49.875 15.775,50.775 16.675,50.775 17.575,50.775 15.325,51.675 16.225,51.675 17.125,51.675 13.075,52.575 13.975,52.575 14.875,52.575 15.775,52.575 16.675,52.575 4.525,53.475 8.125,53.475 10.825,53.475 14.425,53.475 15.325,53.475 16.225,53.475 17.125,53.475 18.025,53.475 16.675,54.375 17.575,54.375 16.225,55.275 17.125,55.275 11.275,56.175 16.675,56.175 17.575,56.175 11.725,57.075 12.625,57.075 16.225,57.075 17.125,57.075 4.075,66.075 4.975,66.075 5.875,66.075 6.775,66.075 4.975,66.975 5.875,66.975 6.775,66.975 8.575,66.975 9.475,66.975 10.375,66.975 5.875,67.875 8.575,67.875 9.475,67.875 10.375,67.875
  other v2: 3.55,46.825 8.1,56.175 7.75,57.9 7.45,68.2
  other v3: 3.475,33 3.325,35.8 3.25,39.225 3.275,41.225 7.45,46.8 14.45,46.8 18.5,46.8 7.45,48.2 14.45,48.2 18.325,48.225 3.5,48.25 3.45,52.2 18.45,52.2 3.625,54.475 18.375,54.75 18.4,57.175 3.425,66.95 3.525,68.125 4.6,68.175
ANODE: Anode.1 R12.1 | length 3.6
  Bottom w0.2: R12.1@12.7,67.075 12.7,70.625 Anode.1@12.725,70.65
CLEAR_CHARGE: R13.2 U11.31 | length 47.7
  Top w0.3: U11.31@9.946,15.7 9.946,14.454 10.16,14.24 v2(10.725,14.24)
  Signal Layer 1 w0.3: v2(7.725,51.3) 7.4,51.3 5.825,49.725 5.825,19.139 v2(10.725,14.24)
  Bottom w0.2: 6.375,55 6.375,52.4 7.475,51.3 v2(7.725,51.3)
  Bottom w0.3: 6.375,55 7,55.625 R13.2@7.25,55.625
DREF_2.048V: R17.1 U1.6 | length 36.9
  Signal Layer 1 w0.3: v2(1.579,36.325) -0.2,38.104 -0.2,43.25 1.073,44.523 1.073,48.473 5.375,52.775 8.2,52.775 10.275,50.7 v2(10.275,48.425)
  Bottom w0.14: 6.44,33.89 U1.6@6.44,34.914 ; v2(10.275,48.425) v2@10.275,48.725
  Bottom w0.3: v2(1.579,36.325) 4.394,33.51 6.06,33.51 6.44,33.89 ; v2(10.275,48.425) 11.35,49.5 R17.1@11.35,49.85